# EAGLE board Nusbio - Ex Bread Board (EAGLE 7.6.0)
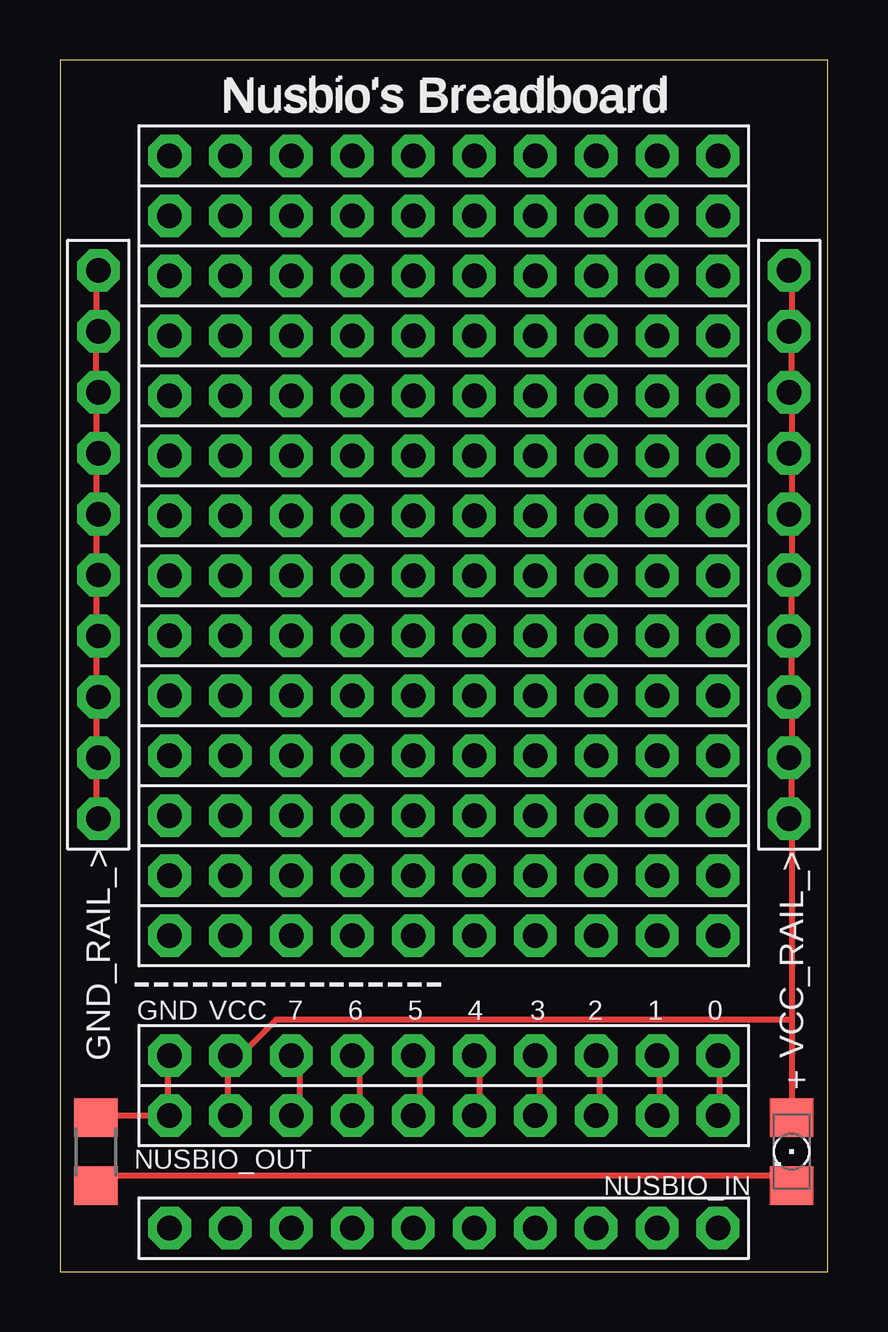
[diagram p0: board, top side]
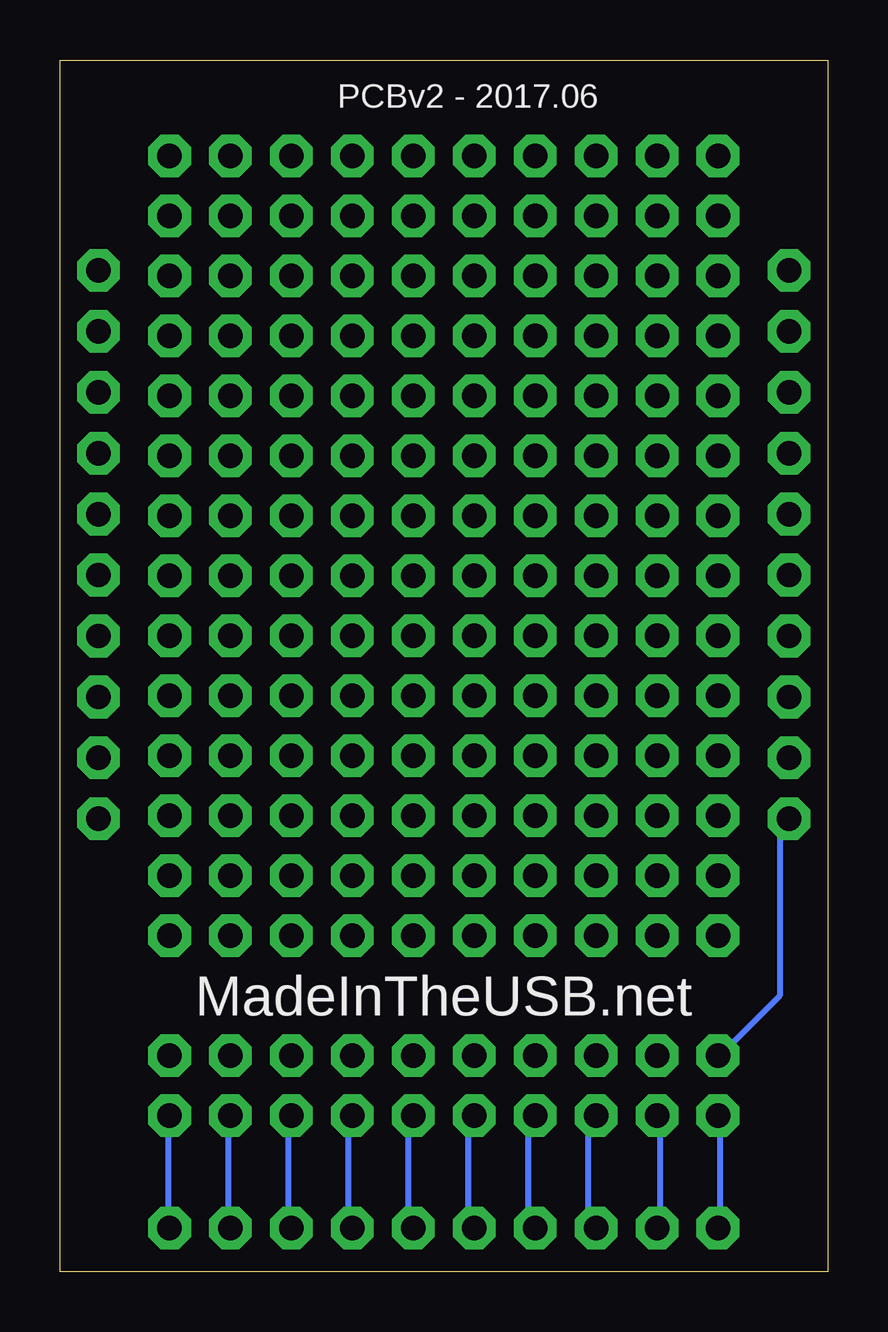
[diagram p1: board, bottom side, seen from below]

Size 32 x 50.5 mm. Coordinates in mm from the lower left corner, seen from the top.
Outline: 0,0 32,0 32,50.5 0,50.5 0,0
Copper layers (1*16): Top 0.035mm / dielectric 1.5mm / Bottom 0.035mm
Design rules "default": minimum track width 10mil, minimum drill 24mil, track to track 8mil, track to pad 8mil, pad to pad 8mil, via to via 8mil, smd to smd 8mil, copper to edge 40mil, drill to drill 8mil, minimum pad ring 10mil, minimum via ring 8mil, stop-mask expansion 4mil, vias tented up to drill 0mil, thermal gap 10mil

## Footprints (pad centres in the part's own frame; a part is rotated, then mirrored left to right if it is on the bottom)
1X10-BIG = drill 1.016 pad 1.778 octagon: 1 -11.43,0; 2 -8.89,0; 3 -6.35,0; 4 -3.81,0; 5 -1.27,0; 6 1.27,0; 7 3.81,0; 8 6.35,0; 9 8.89,0; 10 11.43,0
1206 = smd 1.6 x 1.803: A -1.422,0; C 1.422,0
R1206 = smd 1.6 x 1.803: 1 -1.422,0; 2 1.422,0

## Placement (x,y rotation side)
BREAD_01  PINHD-1X10  [1X10-BIG]  16,14 0 top
BREAD_02  PINHD-1X10  [1X10-BIG]  16,16.5 0 top
BREAD_03  PINHD-1X10  [1X10-BIG]  16,19 0 top
BREAD_04  PINHD-1X10  [1X10-BIG]  16,21.5 0 top
BREAD_05  PINHD-1X10  [1X10-BIG]  16,24 0 top
BREAD_06  PINHD-1X10  [1X10-BIG]  16,26.5 0 top
BREAD_07  PINHD-1X10  [1X10-BIG]  16,29 0 top
BREAD_08  PINHD-1X10  [1X10-BIG]  16,31.5 0 top
BREAD_09  PINHD-1X10  [1X10-BIG]  16,34 0 top
BREAD_10  PINHD-1X10  [1X10-BIG]  16,36.5 0 top
BREAD_11  PINHD-1X10  [1X10-BIG]  16,46.5 0 top
BREAD_12  PINHD-1X10  [1X10-BIG]  16,44 0 top
BREAD_13  PINHD-1X10  [1X10-BIG]  16,41.5 0 top
BREAD_14  PINHD-1X10  [1X10-BIG]  16,39 0 top
GND_RAIL_>  PINHD-1X10  [1X10-BIG]  1.6,30.3 90 top
LED_PWR  [1206]  30.5,5 270 top
NUSBIO_IN  PINHD-1X10  [1X10-BIG]  16,1.81 180 top
NUSBIO_OUT  PINHD-1X10  [1X10-BIG]  16,6.5 180 top
NUSBIO_OUT_2  PINHD-1X10  [1X10-BIG]  16,9 180 top
R_LED_PWR_1K  [R1206]  1.5,5 90 top
VCC_RAIL_>  PINHD-1X10  [1X10-BIG]  30.4,30.3 90 top

## Library data of the parts
BREAD_01-BREAD_09 BREAD_10-BREAD_14 GND_RAIL_> LED_PWR NUSBIO_IN NUSBIO_OUT NUSBIO_OUT_2 R_LED_PWR_1K VCC_RAIL_> = adafruit

## Nets
GND: GND_RAIL_>.1 GND_RAIL_>.2 GND_RAIL_>.3 GND_RAIL_>.4 GND_RAIL_>.5 GND_RAIL_>.6 GND_RAIL_>.7 GND_RAIL_>.8 GND_RAIL_>.9 GND_RAIL_>.10 NUSBIO_IN.10 NUSBIO_OUT.10 NUSBIO_OUT_2.10 R_LED_PWR_1K.2
N$1: NUSBIO_IN.1 NUSBIO_OUT.1 NUSBIO_OUT_2.1
N$2: NUSBIO_IN.2 NUSBIO_OUT.2 NUSBIO_OUT_2.2
N$3: NUSBIO_IN.3 NUSBIO_OUT.3 NUSBIO_OUT_2.3
N$4: NUSBIO_IN.4 NUSBIO_OUT.4 NUSBIO_OUT_2.4
N$5: NUSBIO_IN.5 NUSBIO_OUT.5 NUSBIO_OUT_2.5
N$6: NUSBIO_IN.6 NUSBIO_OUT.6 NUSBIO_OUT_2.6
N$7: NUSBIO_IN.7 NUSBIO_OUT.7 NUSBIO_OUT_2.7
N$8: NUSBIO_IN.8 NUSBIO_OUT.8 NUSBIO_OUT_2.8
N$9: LED_PWR.A NUSBIO_IN.9 NUSBIO_OUT.9 NUSBIO_OUT_2.9 VCC_RAIL_>.1 VCC_RAIL_>.2 VCC_RAIL_>.3 VCC_RAIL_>.4 VCC_RAIL_>.5 VCC_RAIL_>.6 VCC_RAIL_>.7 VCC_RAIL_>.8 VCC_RAIL_>.9 VCC_RAIL_>.10
N$11: LED_PWR.C R_LED_PWR_1K.1

## Tracks (layer width: path | path; a pad name or v marks a point on that pad's centre or on a via)
GND
  Top 0.254: 4.5,6.5 1.5,6.5 R_LED_PWR_1K.2 | 4.5,6.5 4.5,9 NUSBIO_OUT_2.10 | 4.5,6.5 NUSBIO_OUT.10 | GND_RAIL_>.1 1.5,19 1.5,21 GND_RAIL_>.2 1.5,21.5 1.5,23.5 GND_RAIL_>.3 1.5,24 1.5,26 GND_RAIL_>.4 1.5,26.5 1.5,29 GND_RAIL_>.5 1.5,29.5 1.5,31.5 GND_RAIL_>.6 1.5,32 1.5,34 GND_RAIL_>.7 1.5,34.5 1.5,36.5 GND_RAIL_>.8 1.5,37 1.5,39 GND_RAIL_>.9 1.5,39.5 1.5,41.5 GND_RAIL_>.10
  Bottom 0.254: NUSBIO_IN.10 4.5,2 4.5,6.5 NUSBIO_OUT.10 | NUSBIO_OUT_2.10 4.5,9 2,11.5 2,18.5 GND_RAIL_>.1
N$1
  Top 0.254: NUSBIO_OUT_2.1 27.5,9 27.5,6.5 NUSBIO_OUT.1
  Bottom 0.254: NUSBIO_IN.1 27.5,2 27.5,6.5 NUSBIO_OUT.1
N$2
  Top 0.254: NUSBIO_OUT_2.2 25,9 25,6.5 NUSBIO_OUT.2
  Bottom 0.254: NUSBIO_IN.2 25,2 25,6.5 NUSBIO_OUT.2
N$3
  Top 0.254: NUSBIO_OUT_2.3 22.5,9 22.5,6.5 NUSBIO_OUT.3
  Bottom 0.254: NUSBIO_IN.3 22.5,2 22.5,6.5 NUSBIO_OUT.3
N$4
  Top 0.254: NUSBIO_OUT_2.4 20,9 20,6.5 NUSBIO_OUT.4
  Bottom 0.254: NUSBIO_IN.4 20,2 20,6.5 NUSBIO_OUT.4
N$5
  Top 0.254: NUSBIO_OUT_2.5 17.5,9 17.5,6.5 NUSBIO_OUT.5
  Bottom 0.254: NUSBIO_IN.5 17.5,2 17.5,6.5 NUSBIO_OUT.5
N$6
  Top 0.254: NUSBIO_OUT_2.6 15,9 15,6.5 NUSBIO_OUT.6
  Bottom 0.254: NUSBIO_IN.6 15,2 15,6.5 NUSBIO_OUT.6
N$7
  Top 0.254: NUSBIO_OUT_2.7 12.5,9 12.5,6.5 NUSBIO_OUT.7
  Bottom 0.254: NUSBIO_IN.7 12.5,2 12.5,6.5 NUSBIO_OUT.7
N$8
  Top 0.254: NUSBIO_OUT_2.8 10,9 10,6.5 NUSBIO_OUT.8
  Bottom 0.254: NUSBIO_IN.8 10,2 10,6.5 NUSBIO_OUT.8
N$9
  Top 0.254: VCC_RAIL_>.10 30.5,41.5 30.5,39.5 VCC_RAIL_>.9 30.5,39 30.5,37 VCC_RAIL_>.8 30.5,36.5 30.5,34.5 VCC_RAIL_>.7 30.5,34 30.5,32 VCC_RAIL_>.6 30.5,31.5 30.5,29.5 VCC_RAIL_>.5 30.5,29 30.5,26.5 VCC_RAIL_>.4 30.5,26 30.5,24 VCC_RAIL_>.3 30.5,23.5 30.5,21.5 VCC_RAIL_>.2 30.5,21 30.5,19 VCC_RAIL_>.1 30.5,18.5 30.5,10.5 | NUSBIO_OUT.9 7,6.5 7,9 NUSBIO_OUT_2.9 7.5,9 9,10.5 30.5,10.5 | 30.5,10.5 LED_PWR.A
  Bottom 0.254: NUSBIO_IN.9 7,2 7,6.5 NUSBIO_OUT.9
N$11
  Top 0.254: R_LED_PWR_1K.1 1.5,4 30.5,4 LED_PWR.C

## Text on the board
tNames: Nusbio's Breadboard | Nusbio's Breadboard | ---------------- | GND | VCC | 7 | 6 | 5 | 4 | 3 | 2 | 1 | 0 | +
bNames: PCBv2 - 2017.06 | MadeInTheUSB.net